# Altium PCB CW308T_XMEGA.PcbDoc
Units mil, origin at the board's own origin, x right, y up, seen from the top; angles counter-clockwise.
Board outline 2060 x 2540 mil, 2 copper layers (Top Layer, Bottom Layer); 12 components, 38 nets, 122 pads, 105 vias.
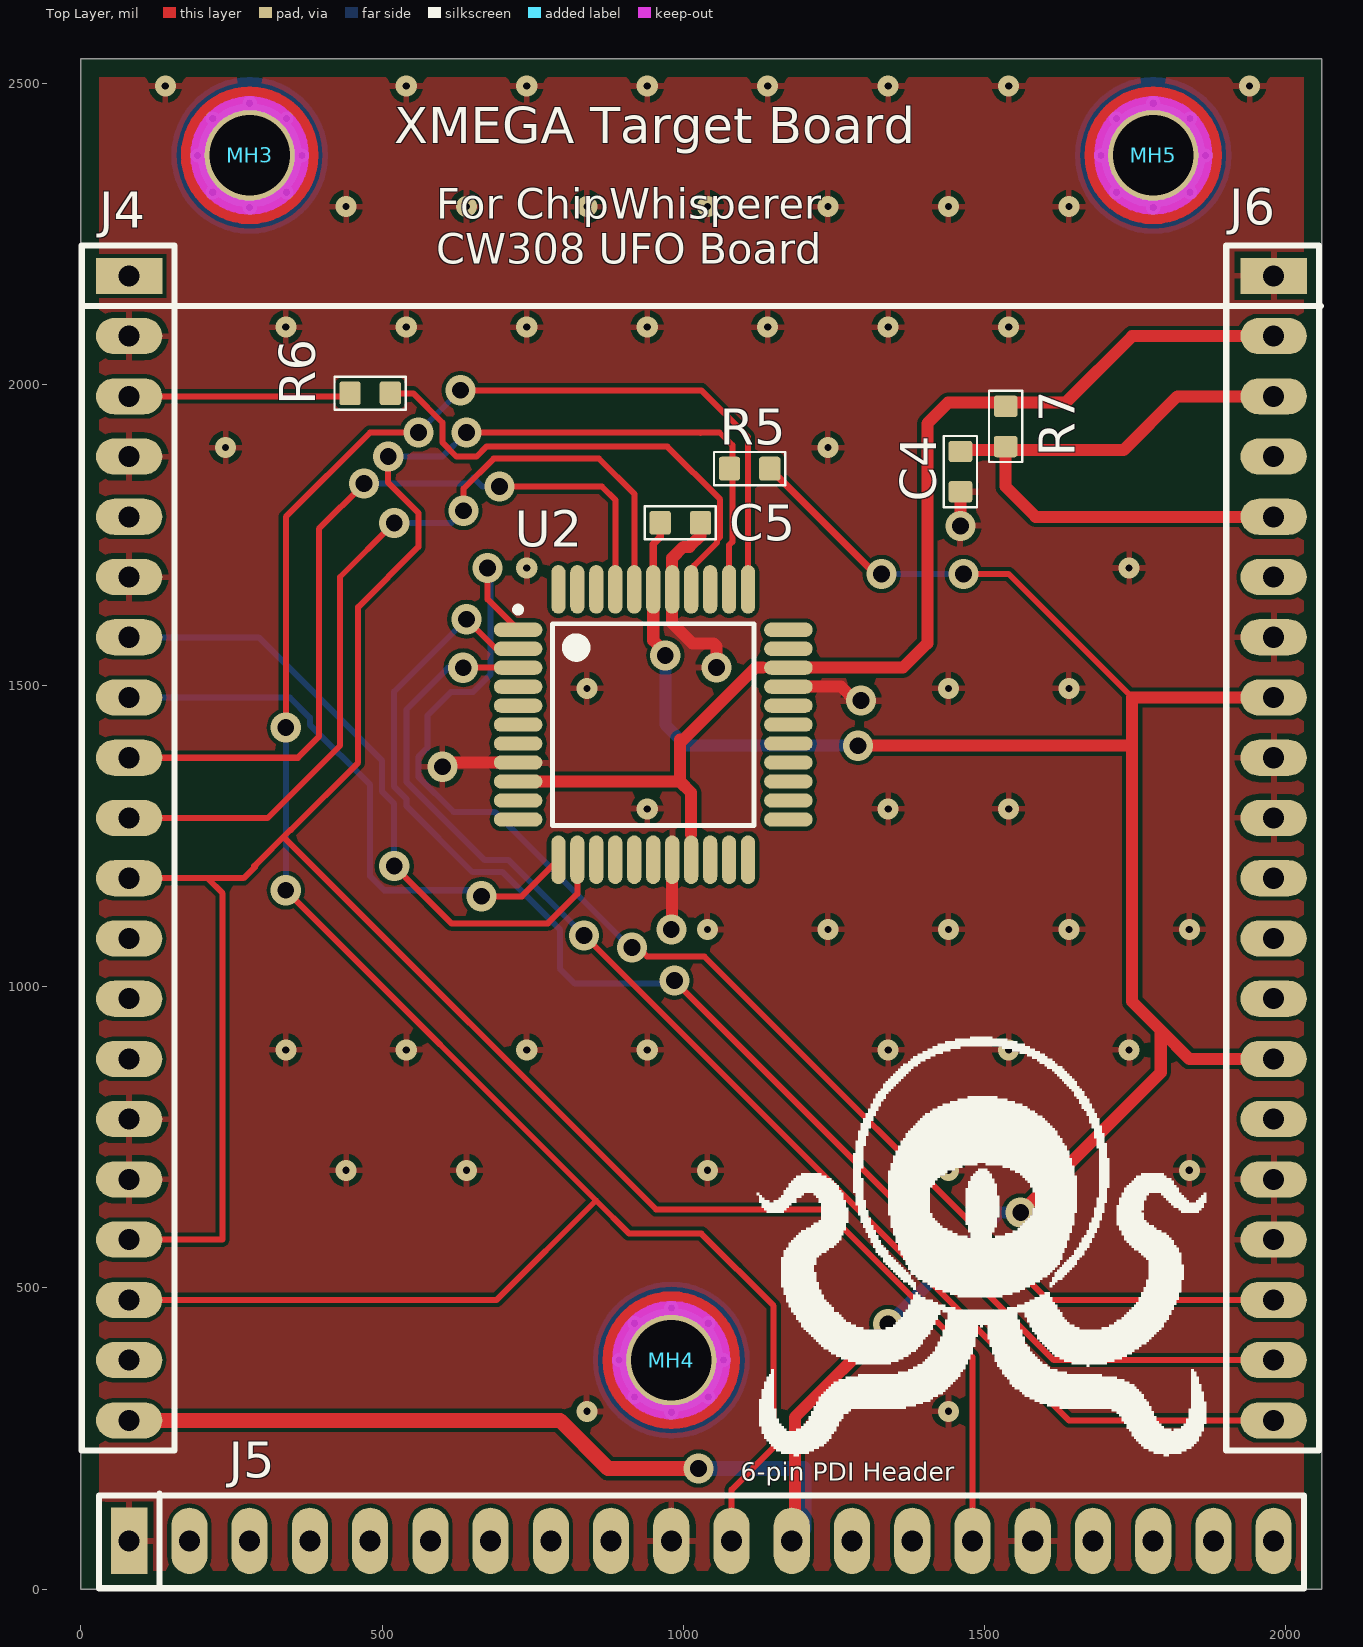
[diagram p0: Top Layer view]
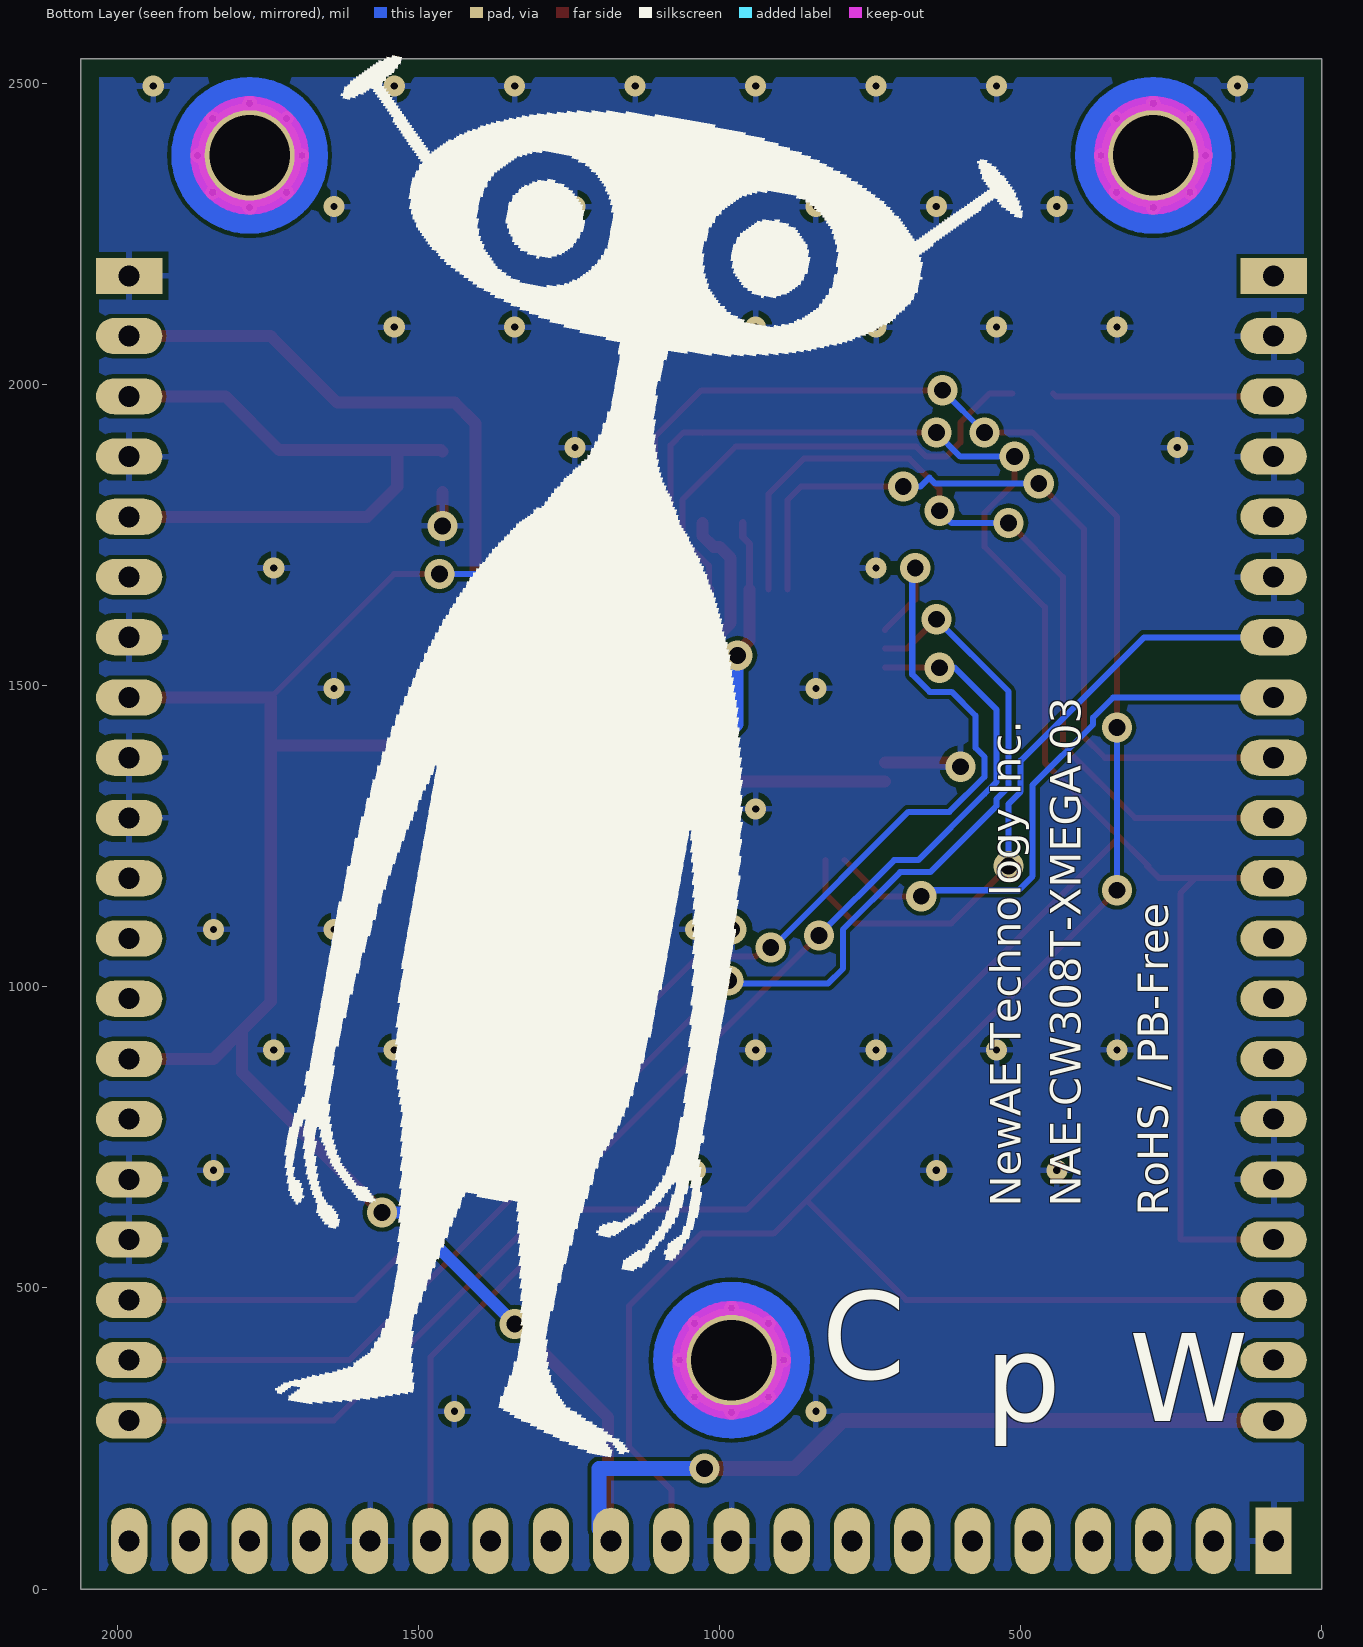
[diagram p1: Bottom Layer view, seen from below]
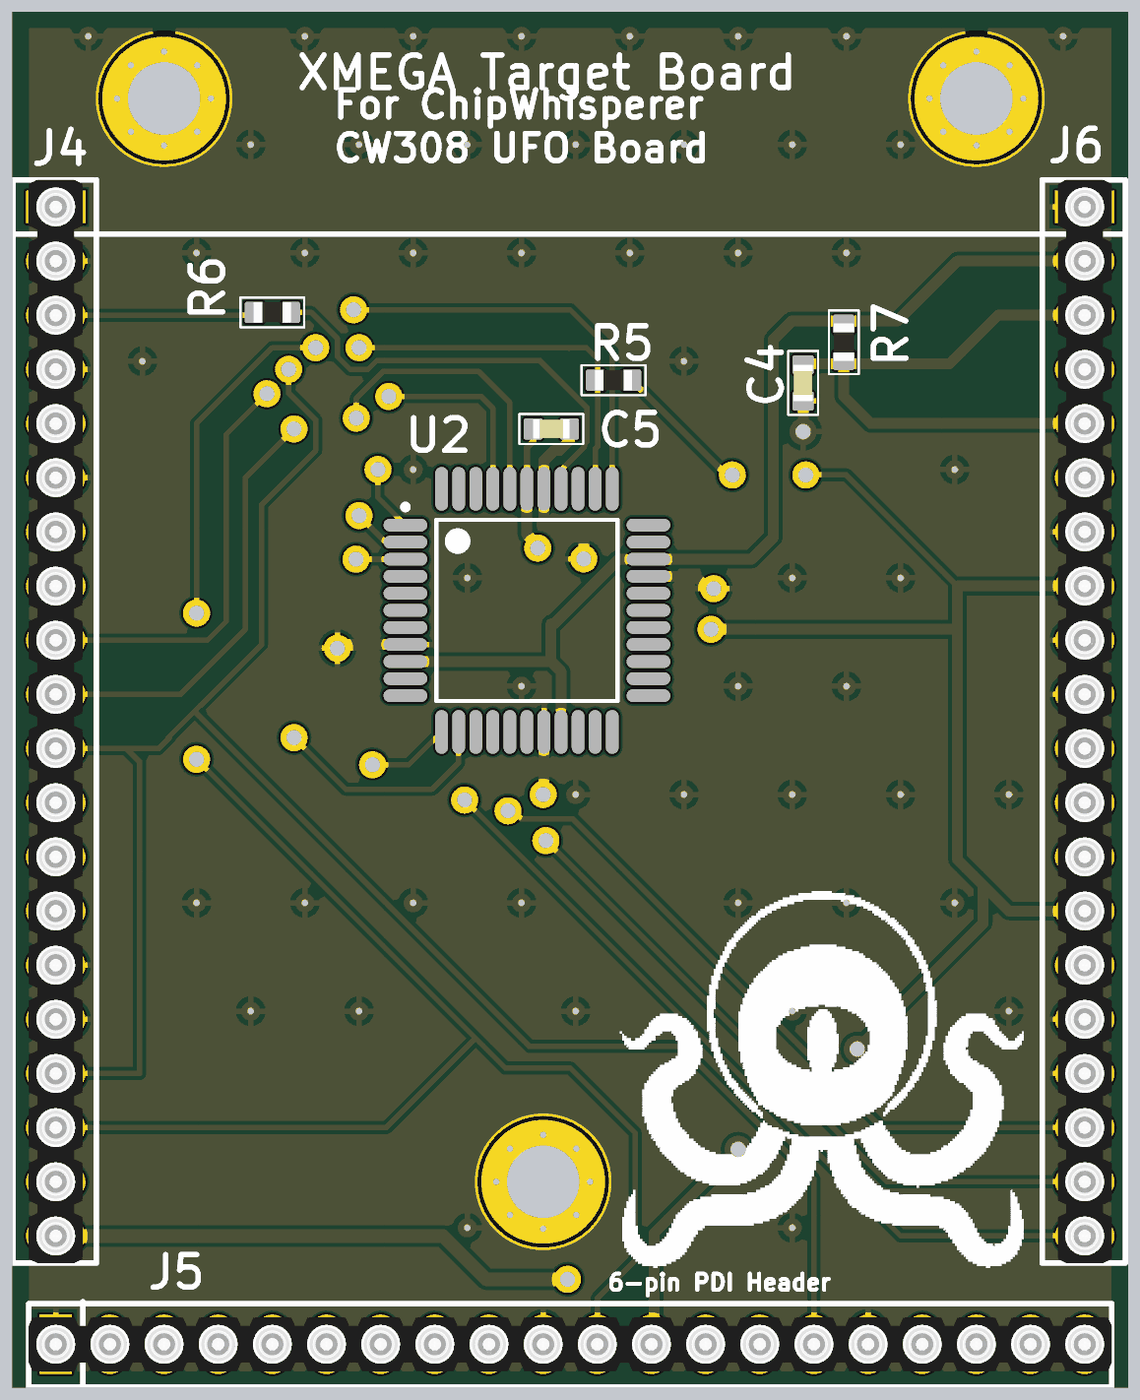
[diagram p2: 3D render of the assembled board from above, using the file's embedded part models]

## Layer stack, top to bottom
Top Solder: solder mask 0.4, Solder Resist, Dk 3.5
Top Layer: signal copper 1.4
Dielectric 1: dielectric 12.6, FR-4, Dk 4.8
Bottom Layer: signal copper 1.4
Bottom Solder: solder mask 0.4, Solder Resist, Dk 3.5

## Board outline
0,0 2060,0 2060,2540 0,2540

## Design rules (kind name [scope] priority, off if disabled: settings)
BoardOutlineClearance [All] p1: gap=30 ignorepadtopadclearanceinfootprint=FALSE except(0: Arc-SplitContinuation Track-SplitContinuation SMDPad-SplitContinuation THPad-SplitContinuation Via-SplitContinuation Fill-SplitContinuation Poly-SplitContinuation Region-SplitContinuation Text-SplitContinuation)
Clearance [All] p1: gap=7 ignorepadtopadclearanceinfootprint=FALSE except(0: Arc-Hole Track-Hole SMDPad-Hole THPad-Hole Via-Hole Fill-Hole Poly-Hole Region-Hole Text-Hole)
PasteMaskExpansion [InComponent('U2')] p1: expansion=-1.5
PolygonConnect [All] p1: connectstyle=Relief reliefconductorwidth=10 reliefentries=4 polygonreliefangle="90 Angle" airgapwidth=10
RoutingVias [All] p1: holewidth=28 width=50 viastyle="Through Hole" minholewidth=28 minwidth=50 maxholewidth=28 maxwidth=50
SolderMaskExpansion [All] p1: expansion=4
Width [All] p1: maxlimit=50 minlimit=10 preferedwidth=10
29 further rules are at their usual default settings.

## Classes and differential pairs
component class CW308A_MICRO: C5 R5 U2
component class CW308A_XMEGA: C4 J4 J5 J6 MH3 MH4 MH5 R6 R7

## Components (designator, comment, footprint, x,y, rotation, side; value= is the part's Value field where it differs from the comment)
C4 "approved sub OK" CAPC1608X90N 1460,1855 r270 top
C5 "approved sub OK" CAPC1608X90N 995,1770 r0 top
J4 "20-Pin Header" 801-87-020-10-001101 80,2180 r0 top locked
J5 "20-Pin Header" 801-87-020-10-001101 80,80 r90 top locked
J6 "20-Pin Header" 801-87-020-10-001101 1980,2180 r0 top locked
MH3 "Mounting-Hole-RND-Altium" Mounting-Hole-RND-Altium 280,2380 r0 top locked
MH4 "Mounting-Hole-RND-Altium" Mounting-Hole-RND-Altium 980,380 r0 top locked
MH5 "Mounting-Hole-RND-Altium" Mounting-Hole-RND-Altium 1780,2380 r0 top locked
R5 "Thick Film" RESC1608X55N 1110,1860 r180 top
R6 "Thick Film" RESC1608X55N 480,1985 r180 top
R7 "Thick Film" RESC1608X55N 1535,1930 r270 top
U2 "ATxmega128D4- AU" 44A_M 950,1435 r0 top

## Footprints (in the part's own frame and the unit in brackets; to place one, negate y for a bottom-side part, rotate by r counter-clockwise, add the part's x,y. Pads: shape width x height; smd on the part's side, far side on the other; paste and mask are expansions set on the pad)
44A_M [mm] "Thin QFP, 44-Leads, Body 10x10mm, Pitch 0.8mm, IPC Low Density"
  oval 2.05x0.6 smd: 1(-5.7,4) 2(-5.7,3.2) 3(-5.7,2.4) 4(-5.7,1.6) 5(-5.7,0.8) 6(-5.7,0) 7(-5.7,-0.8) 8(-5.7,-1.6) 9(-5.7,-2.4) 10(-5.7,-3.2) 11(-5.7,-4) 23(5.7,-4) 24(5.7,-3.2) 25(5.7,-2.4) 26(5.7,-1.6) 27(5.7,-0.8) 28(5.7,0) 29(5.7,0.8) 30(5.7,1.6) 31(5.7,2.4) 32(5.7,3.2) 33(5.7,4)
  oval 0.6x2.05 smd: 12(-4,-5.7) 13(-3.2,-5.7) 14(-2.4,-5.7) 15(-1.6,-5.7) 16(-0.8,-5.7) 17(0,-5.7) 18(0.8,-5.7) 19(1.6,-5.7) 20(2.4,-5.7) 21(3.2,-5.7) 22(4,-5.7) 34(4,5.7) 35(3.2,5.7) 36(2.4,5.7) 37(1.6,5.7) 38(0.8,5.7) 39(0,5.7) 40(-0.8,5.7) 41(-1.6,5.7) 42(-2.4,5.7) 43(-3.2,5.7) 44(-4,5.7)
  silkscreen extent -5.82,-4.25 4.25,4.97, body extent -5,-5 5,5, height 1.2
801-87-020-10-001101 [mil]
  rect 110x60 hole 35: 1(0,0)
  oval 110x60 hole 35: 2(0,-100) 3(0,-200) 4(0,-300) 5(0,-400) 6(0,-500) 7(0,-600) 8(0,-700) 9(0,-800) 10(0,-900) 11(0,-1000) 12(0,-1100) 13(0,-1200) 14(0,-1300) 15(0,-1400) 16(0,-1500) 17(0,-1600) 18(0,-1700) 19(0,-1800) 20(0,-1900)
  silkscreen extent -79,-1950 79,50, body extent -50,-1950 50,50, height 224
CAPC1608X90N [mm]
  round 0.254 on Mech15: 0(0,0)
  rrect25% 0.9x1 smd: 1(-0.85,0) 2(0.85,0)
  Top Layer pour cut-out: -0.6,0.5 -0.4,0.7 0.4,0.7 0.6,0.5 0.6,-0.5 0.4,-0.7 -0.4,-0.7 -0.6,-0.5
  silkscreen extent -1.5,-0.7 1.5,0.7, body extent -0.85,-0.45 0.85,0.45, height 0.89
Mounting-Hole-RND-Altium [mm] "Mounting Hole, Altium, 4.4mm pad, 3.4mm plated hole"
  round 4.4 hole 3.4 mask+0.038: MOUNT(0,0)
  Top Layer circle w1: c0,0 r2.4
  Bottom Layer circle w1.2: c0,0 r2.702
  Keep-Out Layer circle w0.6: c0,0 r2.2
RESC1608X55N [mm] "Chip Resistor, Body 1.6x0.8mm, EIA 0603, IPC Medium Density"
  round 0.254 on Mech15: 0(0,0)
  rrect25% 0.9x1 smd: 1(-0.85,0) 2(0.85,0)
  Top Layer pour cut-out: -0.6,0.5 -0.4,0.7 0.4,0.7 0.6,0.5 0.6,-0.5 0.4,-0.7 -0.4,-0.7 -0.6,-0.5
  silkscreen extent -1.5,-0.7 1.5,0.7, body extent -0.87,-0.47 0.88,0.48, height 0.54

## Part data
C4 C5: library part CAPC_100n_0603_X7R_50V_10%, "Capacitor SMD Cer 100nF 10% 50V X7R 0603"
J4 J5 J6: library part 801-87-020-10-001101, "1x20 Header, Machined"
MH3 MH4 MH5: library part CMP-0001-00029-1, "Mounting Hole, Altium, 4.4mm pad, 3.4mm plated hole"
R5: library part RES_10K_0603_1%, "Resistor SMD chip 10k Ohm 0.1W 1% 0603"
R6: library part RES_100R_0603_1%, "Resistor SMD chip 100 Ohm 0.1W 1% 0603"
R7: library part RES_51R_0603_1%, "Resistor SMD chip 51 Ohm 0.1W 1% 0603"
U2: library part CMP-0094-00044-3, "8/16-bit AVR XMEGA D4 Microcontroller, 1.6-3.6V, 32MHz, 128KB + 8KB Flash, 2KB EEPROM, 8KB SRAM, 44-pin TQFP, Industrial Grade (-40°C to 85°C), Pb-Free"

## Via types
v1: diameter 35, hole 12, Top Layer to Bottom Layer, tented both sides, 51 vias
v2: diameter 50, hole 28, Top Layer to Bottom Layer, 27 vias
v3: diameter 23.62, hole 11.81, Top Layer to Bottom Layer, tented both sides, 24 vias
v4: diameter 50, hole 28, Top Layer to Bottom Layer, tented both sides, 3 vias

## Nets (pads, with @x,y where several pads share a name; then routed paths per layer and width w, separated by ;. In a path a pad name is that pad's centre, name@x,y a point inside that pad or via, vN(x,y) a via of type N, cw(c..) or ccw(c..) an arc to the next point about the centre after c; other vN are vias at no path point)
CLKIN: J4.3 R6.2 | length 368.6
  Top Layer w10: J4.3 441.54,1980 R6.2
CLKOUT: J4.5
FILT_HP: J6.6
FILT_LP: C4.1 J6.3 J6.5 R7.2 | length 1084.3
  Top Layer w20: C4.1 1462.17,1890.63 R7.2@1535,1890.63 ; J6.5 1585,1780 1535,1830 R7.2@1535,1890.63 ; J6.3 1820,1980 1730.63,1890.63 R7.2@1535,1890.63
FILTIN: C5.1 J4.20 J5.12 J6.8 J6.14 R5.1 U2.39 | length 5333.9
  Top Layer w10: v2(1329.23,1685) v2@1340,1685 ; v2(1465,1685) 1540,1685 1745,1480
  Top Layer w12: U2.39 950,1735 961.54,1746.54 C5.1 ; R5.1 1318.46,1685 v2(1329.23,1685)
  Top Layer w20: U2.39 950,1575 975,1550 v2(970,1550) ; J5.12 1185,85 1185,285 v4(1340,440) ; v2(1290,1400) 1740,1400 1745,1405 ; v4(1560,625) 1792.5,857.5 1792.5,927.5 ; J6.14 1840,880 1792.5,927.5 ; J6.8 1745,1480 1745,1405 ; 1745,1405 1745,975 1792.5,927.5
  Top Layer w25: J4.20 795,280 875,200 v2(1025,200)
  Bottom Layer w10: v2(1329.23,1685) v2(1465,1685)
  Bottom Layer w20: v2(970,1550) 970,1435 1005,1400 v2(1290,1400) ; v4(1340,440) 1525,625 v4(1560,625)
  Bottom Layer w25: v2(1025,200) 1200,200 1200,100 J5.12
GND: C4.2 C5.2 J4.2 J4.4 J4.6 J4.15 J4.16 J5.1 J5.10 J5.16 J6.1 J6.4 J6.7 J6.9 J6.10 J6.16 J6.17 U2.8 U2.18 U2.30 U2.38 | length 747.6
  Top Layer w20: v2(600,1365) 607.01,1372.01 U2.8 ; v2(980,1095) 981.5,1096.5 U2.18 ; C5.2 1028.46,1748.46 1010,1730 1000,1730 981.5,1711.5 U2.38 981.5,1603.5 1015,1570 1050,1570 1055,1565 v2(1055,1530) ; U2.30 1262.01,1497.99 1285,1475 v2(1295,1475) ; v4(1460,1765) C4.2
  other v1: 840,295 1440,295 440,695 640,695 1040,695 1440,695 1840,695 340,895 540,895 740,895 940,895 1340,895 1540,895 1740,895 1040,1095 1240,1095 1440,1095 1640,1095 1840,1095 940,1295 1340,1295 1540,1295 840,1495 1440,1495 1640,1495 740,1695 1740,1695 240,1895 1240,1895 340,2095 540,2095 740,2095 940,2095 1140,2095 1340,2095 1540,2095 440,2295 640,2295 840,2295 1040,2295 1240,2295 1440,2295 1640,2295 140,2495 540,2495 740,2495 940,2495 1140,2495 1340,2495 1540,2495 1940,2495
GPIO1/TX: J4.7 U2.13 | length 1108.4
  Top Layer w10: v2(520,1200) 615,1105 775,1105 824.02,1154.02 U2.13
  Bottom Layer w10: J4.7 295,1580 500,1375 500,1323.58 520,1303.58 v2(520,1200)
GPIO2/RX: J4.8 U2.12 | length 969.9
  Top Layer w10: v2(665,1150) 731.93,1150 U2.12
  Bottom Layer w10: J4.8 346.57,1480 380,1446.57 380,1435 480,1335 480,1183.43 503.43,1160 655,1160 v2(665,1150)
GPIO3: J4.9 U2.41 | length 1365.6
  Top Layer w10: J4.9 360,1380 395,1415 395,1760 v2(470,1835) ; v2(695,1830) 865,1830 887.01,1807.99 U2.41
  Bottom Layer w10: v2(470,1835) 641.57,1835 651.57,1845 666.57,1830 v2(695,1830)
GPIO4/TRIG: J4.10 U2.40 | length 1453.8
  Top Layer w10: J4.10 310,1280 430,1400 430,1680 v2(520,1770) ; v2(635,1790) 635,1826.57 684.93,1876.5 860,1876.5 918.5,1817.99 U2.40
  Bottom Layer w10: v2(520,1770) 615,1770 v2(635,1790)
HDR1: J4.18 J5.11 U2.34 | length 4117.8
  Top Layer w10: J4.18 690,480 855,645 ; v2(340,1160) 855,645 ; v2(340,1430) 340,1780 480,1920 v2(560,1920) ; v2(630,1990) 1030,1990 1107.48,1912.52 U2.34 ; J5.11 1080,165 1150,235 1150,470 1030,590 910,590 855,645
  Bottom Layer w10: v2(340,1160) v2(340,1430) ; v2(560,1920) v2(630,1990)
HDR3: J5.13
HDR4: J5.14
HDR5: J4.11 J4.17 J5.15 R5.2 U2.35 | length 4574.9
  Top Layer w10: J4.17 235,580 235,1155 210,1180 J4.11 270,1180 290,1200 287.5,1200 348.44,1260.94 ; 337.5,1247.5 955,630 1235,630 1480,385 J5.15 ; 348.28,1260 460,1371.72 460,1630 560,1730 560,1786.57 510,1836.57 v2(510,1880) ; v2(640,1920) 1027.5,1920 ; 1028.46,1919.04 1027.5,1920 ; U2.35 1075.98,1733.22 1081.18,1738.41 1081.18,1898.82 1060,1920 1027.5,1920
  Bottom Layer w10: v2(510,1880) 600,1880 v2(640,1920)
HDR7: J5.17
HDR8: J5.18
HDR9: J5.19
HDR10: J5.20
JTAG_NRST: J5.8
JTAG_TCK: J5.6
JTAG_TDI: J5.3
JTAG_TDO: J5.4
JTAG_TMS: J5.5
JTAG_TRST: J5.2
JTAG_VREF: J5.7
LED1: J6.18 U2.1 | length 2323
  Top Layer w10: v2(675,1695) 675,1643.07 U2.1 ; v2(915,1065) 925,1065 940,1050 1035,1050 1605,480 J6.18
  Bottom Layer w10: v2(675,1695) 680,1690 680,1518.43 651.06,1489.49 614.49,1489.49 575,1450 575,1396.57 560,1381.57 560,1348.43 618.43,1290 686.57,1290 911.57,1065 v2(915,1065)
LED2: J6.19 U2.2 | length 2337.2
  Top Layer w10: v2(640,1610) 689.02,1560.98 U2.2 ; v2(985,1010) 1615,380 J6.19
  Bottom Layer w10: v2(640,1610) 520,1490 520,1331.86 540,1311.86 540,1300 650,1190 700,1190 795,1095 795,1030 820,1005 980,1005 v2(985,1010)
LED3: J6.20 U2.3 | length 2213.4
  Top Layer w10: v2(634.49,1529.49) U2.3 ; v2(835,1085) 1640,280 J6.20
  Bottom Layer w10: v2(634.49,1529.49) 609.49,1529.49 540,1460 540,1340.15 560,1320.15 560,1320 670,1210 710,1210 v2(835,1085)
MISO: J4.13
MOSI: J4.14
NetR6_1: R6.1 U2.37 | length 823.1
  Top Layer w10: R6.1 551.57,1985 600,1936.57 600,1903.43 623.43,1880 656.57,1880 673.06,1896.5 973.5,1896.5 1061.18,1808.82 1061.18,1746.7 1055.98,1741.5 1055.98,1737.37 1017.68,1699.06 1017.68,1664.09 U2.37
NetU2_7: U2.7
SCK: J4.12
SHUNTL: J6.2 R7.1 U2.9 U2.19 U2.31 | length 1868.7
  Top Layer w20: U2.9 994.49,1340.51 ; 1012.99,1252.63 1012.99,1322.01 994.49,1340.51 ; 1132.37,1529.49 1119.49,1529.49 1000,1410 994.49,1410 994.49,1340.51 ; U2.31 1364.49,1529.49 1405,1570 1405,1935 1439.37,1969.37 1535,1969.37 1634.37,1969.37 1745,2080 J6.2
VCC1.2: J6.11
VCC1.8: J6.12
VCC2.5: J6.13
VCC5.0: J6.15
pads on no net: C4.0 C5.0 J4.1 J4.19 J5.9 MH3.MOUNT MH4.MOUNT MH5.MOUNT R5.0 R6.0 R7.0 U2.4 U2.5 U2.6 U2.10 U2.11 U2.14 U2.15 U2.16 U2.17 U2.20 U2.21 U2.22 U2.23 U2.24 U2.25 U2.26 U2.27 U2.28 U2.29 U2.32 U2.33 U2.36 U2.42 U2.43 U2.44
copper on no net:
  other v3: 980,293.39 918.75,318.75 1041.25,318.75 893.39,380 1066.61,380 918.75,441.25 1041.25,441.25 980,466.61 280,2293.39 1780,2293.39 218.75,2318.75 341.25,2318.75 1718.75,2318.75 1841.25,2318.75 193.39,2380 366.61,2380 1693.39,2380 1866.61,2380 218.75,2441.25 341.25,2441.25 1718.75,2441.25 1841.25,2441.25 280,2466.61 1780,2466.61

## Polygon pours and split planes (outlines as drawn)
GND on Bottom Layer "GNDPOUR" (solid, remove dead copper, pour order 2): 30,2660 2030,2660 2050,2640 2045,2635 2045,25 30,25 10,45 15,50 15,2640
GND on Top Layer "GND_L01_P004" (solid, pour order 4): -105,2725 -95,2735 2140,2735 2140,-130 2085,-185 2040,-140 -55,-140 -55,2565 -105,2615

## Silkscreen, mask and mechanical layers (free items; w line width, h text height)
Top Overlay:
  drawing of 4 lines, arcs and shapes, not listed
  text "XMEGA Target Board" at 520,2400 h60
  text "For ChipWhisperer / CW308 UFO Board" at 590,2200 h50
  text "6-pin PDI Header" at 1095,180 h30
Bottom Overlay:
  drawing of 4 lines, arcs and shapes, not listed
  text "NAE-CW308T-XMEGA-03" at 400,635 h50 r270
  text "NewAE Technology Inc." at 500,635 h50 r270
  text "RoHS / PB-Free" at 255,620 h50 r270
  text "C" at 830,300 h250
  text "W" at 320,230 h250
  text "p" at 560,230 h250
Board Outline:
  lines w15: 0,2680 5,2680 ; 0,0 2060,0 2060,635 2060,1995 2060,2540 0,2540 0,0